# Allegro board EVAL-CN0565-ARDZ Allegro Project.brd
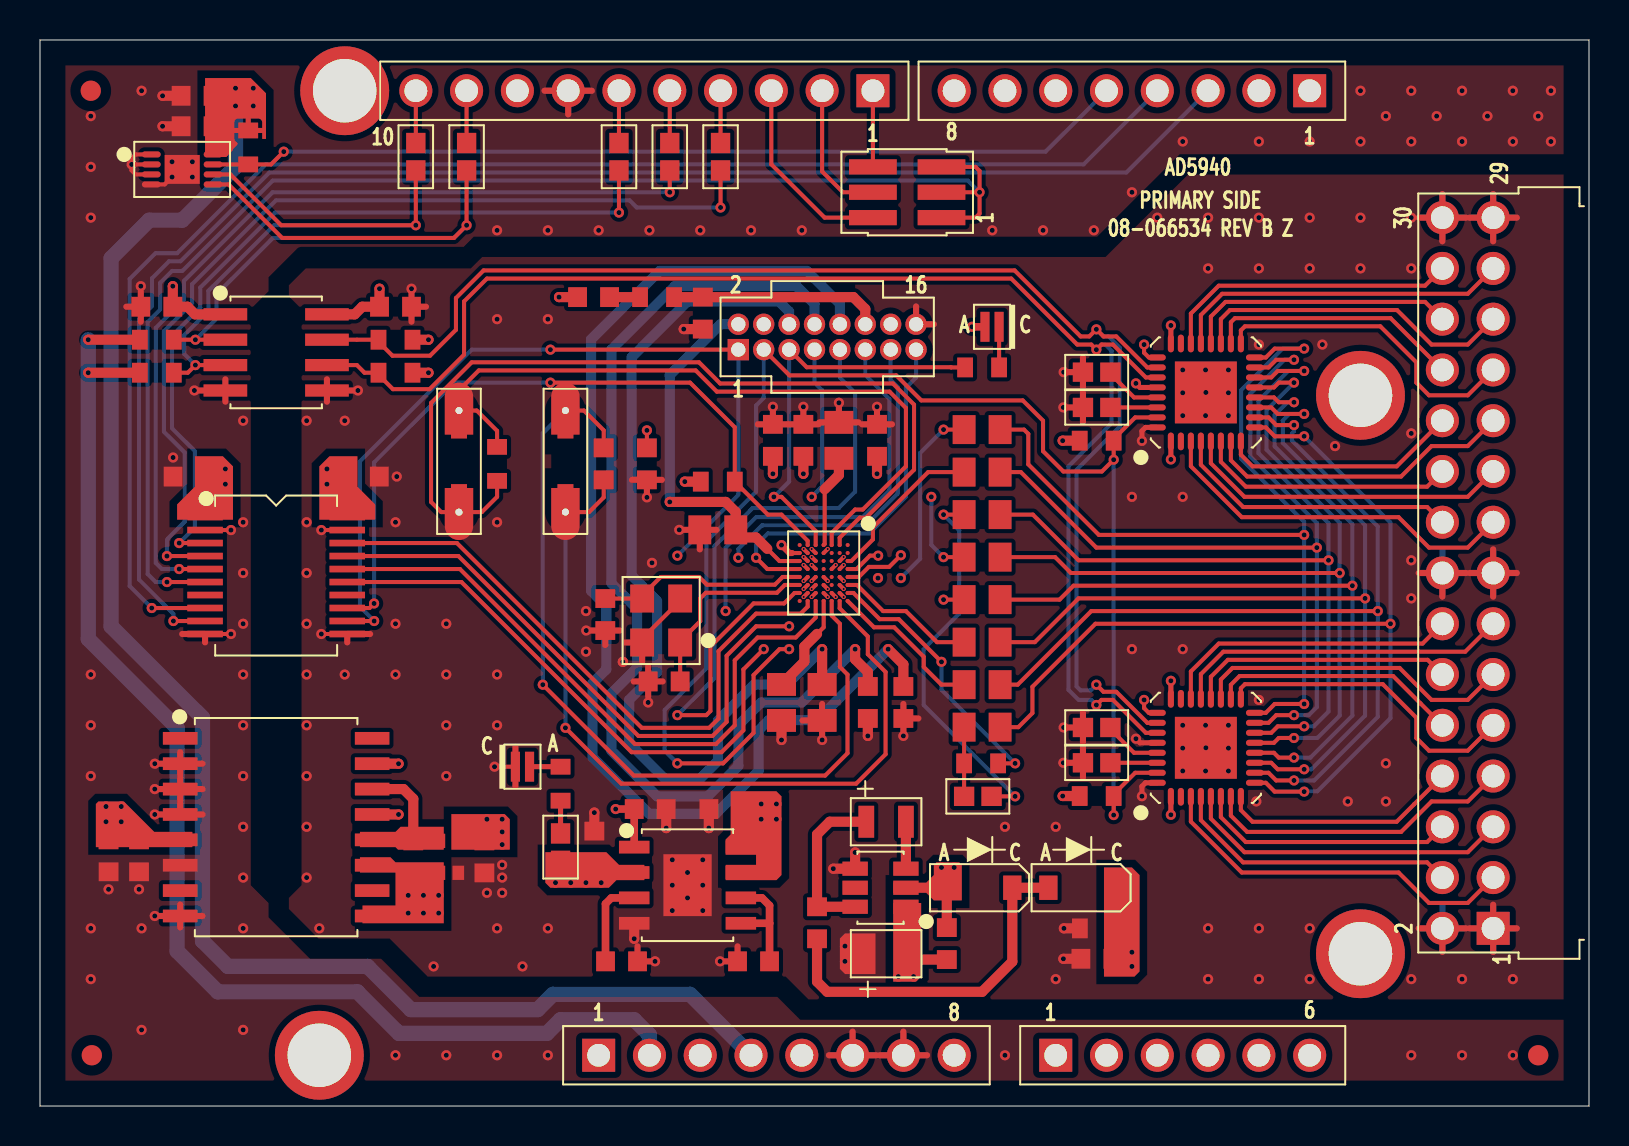
[diagram p0: board, top side]
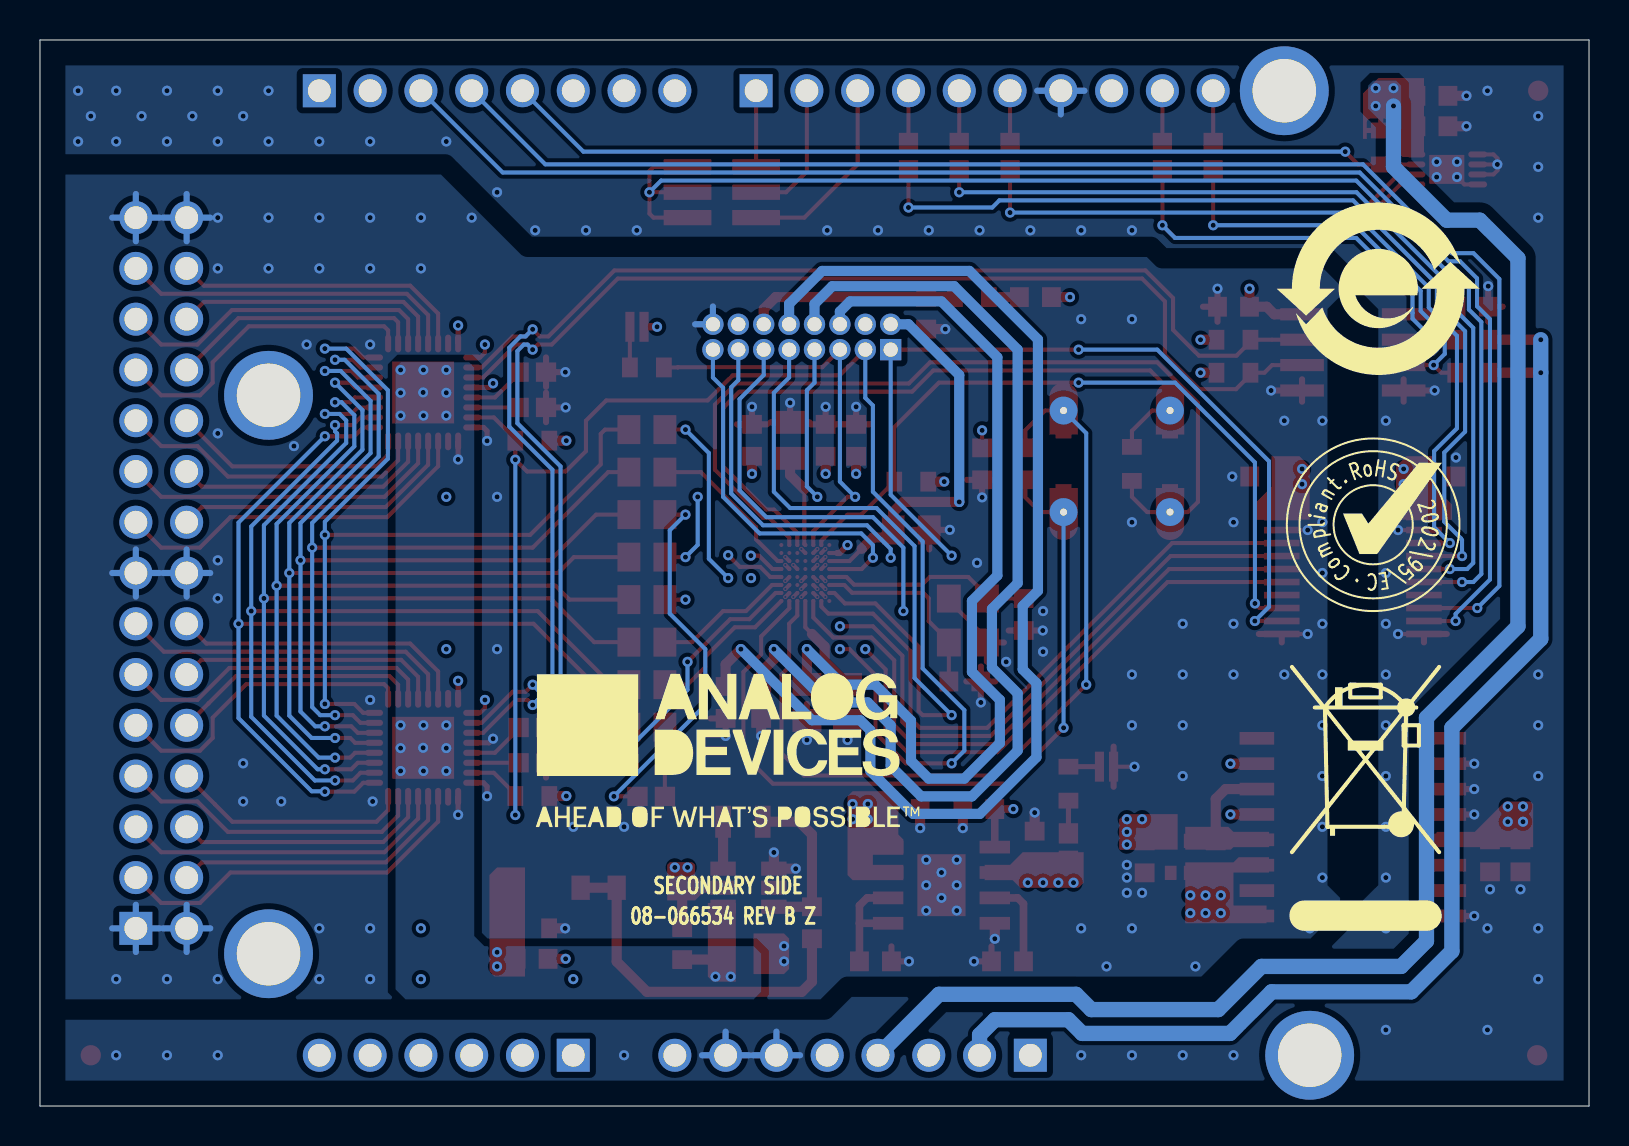
[diagram p1: board, bottom side, seen from below]

Outline 77.47 x 53.34 mm; copper layers: TOP, L2_GND, L3_PWR, BOTTOM. Coordinates in mm from the lower left corner of the outline.
Outline path: 0,53.34 0,0 77.47,0 77.47,53.34 0,53.34

## Design rules (mm)
constraint set DEFAULT: min track width 0.203

## Placement (name value [footprint] x y rotation side)
A1  ADUM1250ARZ  [SO8]  11.81 37.71 270 top
C1  0.47uF  [C0805]  47.12 18.96 180 top
C2  0.47uF  [C0805]  47.12 21.08 180 top
C3  0.47uF  [C0805]  47.12 23.21 180 top
C4  0.47uF  [C0805]  47.12 25.34 180 top
C5  0.47uF  [C0805]  47.12 27.46 180 top
C6  0.47uF  [C0805]  47.12 29.59 180 top
C7  0.47uF  [C0805]  47.12 31.72 180 top
C8  0.47uF  [C0805]  47.12 33.84 180 top
C9  4.7uF  [C0603]  41.86 33.31 90 top
C10  0.47uF  [C0805]  33.9 28.83 180 top
C11  2pF  [C0603]  31.22 21.24 180 top
C12  1uF  [C0603]  43.18 20.19 270 top
C13  0.1uF  [C0603]  41.4 20.19 270 top
C14  0.47uF  [C0805]  39.96 33.31 90 top
C15  2pF  [C0603]  28.27 24.59 270 top
C16  0.47uF  [C0805]  39.12 20.19 270 top
C17  0.47uF  [C0805]  37.08 20.19 270 top
C18  0.1uF  [C0603]  38.18 33.31 90 top
C19  0.1uF  [C0603]  36.65 33.31 90 top
C20  10uF  [C0603]  7.86 50.55 180 top
C21  0.1uF  [C0603]  7.86 49.02 180 top
C22  10uF  [C0603]  30.52 14.86 0 top
C23  1uF  [C0603]  29.08 7.24 0 top
C24  10uF  [C0603]  34.25 14.86 180 top
C25  1uF  [C0603]  35.69 7.24 180 top
C26  1uF  [C0603]  5.84 39.99 180 top
C27  10uF  [C0603]  27.72 12.95 90 top
C28  10uF  [C0603]  3.43 12.52 270 top
C30  0.1uF  [C0603]  4.95 12.52 270 top
C31  10uF  [C0603]  33.15 39.67 270 top
C32  0.1uF  [C0603]  18.67 12.47 270 top
C34  1uF  [C0603]  17.78 39.99 0 top
C35  10uF  [C0603]  22.23 12.47 270 top
C58  0.1uF  [C0603]  7.46 31.5 0 top
C59  0.1uF  [C0603]  16.17 31.5 0 top
C60  4.7uF  [CPL0805]  42.32 14.22 0 top
C61  4.7uF  [CPL0805]  42.32 7.62 0 top
C62  22uF  [C0603]  38.86 9.17 90 top
C63  22uF  [C0603]  52.86 7.37 180 top
C64  22uF  [C0603]  45.35 8.13 270 top
CLPF  0.22uF  [C0603]  30.35 32.13 270 top
CTIA  220pF  [C0603]  28.19 32.13 270 top
D1  1N4148W-7-F  [SOD123-2]  46.99 10.92 180 top
D2  1N4148W-7-F  [SOD123-2]  52.07 10.92 180 top
DS1  LXZ1-PD01  [LEDSML51W67H26]  47.61 38.99 180 top
DS2  LXZ1-PM01  [LEDSML51W67H26]  24.13 16.98 0 top
E1  600OHM AT 100MEGHZ  [L0603]  27.69 40.47 0 top
E2  1.8K AT 100MEGHZ  [L0402]  20.45 11.67 0 top
E3  1.8K AT 100MEGHZ  [L0402]  20.45 13.27 0 top
JP1  5110  [CNKEYSTONE5110]  52.85 18.94 0 top
JP2  5110  [CNKEYSTONE5110]  52.85 17.17 0 top
JP3  5110  [CNKEYSTONE5110]  52.85 36.72 0 top
JP4  5110  [CNKEYSTONE5110]  52.85 34.95 0 top
JP5  5110  [CNKEYSTONE5110]  46.9 15.49 0 top
JP7  5110  [CNKEYSTONE5110]  18.8 47.5 90 top
JP8  5110  [CNKEYSTONE5110]  21.34 47.5 90 top
JP9  5110  [CNKEYSTONE5110]  28.96 47.5 90 top
JP10  5110  [CNKEYSTONE5110]  31.5 47.5 90 top
JP11  5110  [CNKEYSTONE5110]  34.04 47.5 90 top
JP12  5110  [CNKEYSTONE5110]  26.04 12.95 90 top
NOREF  -  []  253.11 151.85 0 top
NOREF#2  -  []  0 53.34 0 top
NOREF#3  -  []  22.24 32.31 0 top
NOREF#4  -  [unnamed#2]  13.97 2.54 0 top
NOREF#5  -  []  13.97 2.54 0 top
NOREF#6  -  []  -111.76 -130.81 0 top
NOREF#7  -  []  -111.76 -130.81 0 top
NOREF#8  -  []  0 0 0 top
NOREF#9  -  []  24.13 16.98 0 top
NOREF#10  -  []  26.15 31.26 0 top
NOREF#11  -  []  27.94 2.54 0 top
NOREF#12  -  []  38.23 8.89 270 top
NOREF#13  -  [unnamed#2]  15.24 50.8 0 top
NOREF#14  -  []  22.39 31.26 0 top
NOREF#15  -  []  77.47 0 0 top
NOREF#16  -  [unnamed#3]  2.54 50.8 0 top
NOREF#17  -  []  -75.44 4.19 0 top
NOREF#18  -  [unnamed#2]  66.04 7.62 0 top
NOREF#19  -  []  -111.76 -130.81 0 top
NOREF#20  -  []  0 0 0 top
NOREF#21  -  []  77.47 0 90 top
NOREF#22  -  []  13.97 2.54 0 top
NOREF#23  -  []  -73.66 195.58 0 top
NOREF#24  -  []  -111.76 -130.81 0 top
NOREF#25  -  []  0 0 0 top
NOREF#26  -  []  286 327.41 0 top
NOREF#27  -  [unnamed#3]  2.59 2.54 0 top
NOREF#28  -  []  -50.8 240.03 0 top
NOREF#29  -  [unnamed#2]  66.04 35.56 0 top
NOREF#30  -  [unnamed#3]  74.93 2.54 0 top
NOREF#31  -  []  77.47 0 90 top
NOREF#32  -  []  172.47 93.73 0 top
NOREF#33  -  []  77.47 53.34 180 top
NOREF#34  -  []  0 53.34 0 top
NOREF#35  -  []  0 53.34 270 top
NOREF#36  -  []  25.79 30.71 0 top
NOREF#37  -  []  268.35 154.69 0 top
NOREF#38  -  []  10.54 40.89 180 bottom
NOREF#39  -  []  43.05 17.78 180 bottom
NOREF#40  -  []  1.91 25.65 180 bottom
NOREF#41  -  []  10.8 29.08 180 bottom
P1  TSW-115-08-F-D-RA  [CNHDRRA2X15H224]  72.68 8.89 90 top
P3  FTSH-108-01-L-D-K  [CNHDR2X8H235]  34.92 37.85 0 top
P4  SSQ-106-03-G-S  [CNSAMTECSSQ-106-XX-X-S]  50.8 2.54 0 top
P5  SSQ-108-03-G-S  [CNSAMTECSSQ-108-XX-X-S]  27.94 2.54 0 top
P7  20021121-00006C4LF  [CNSMMHDR2X3L150W135H193]  43.37 45.72 90 top
P8  SSQ-110-03-G-S  [CNSAMTECSSQ-110-XX-X-S]  41.66 50.8 180 top
P9  SSQ-108-03-G-S  [CNSAMTECSSQ-108-XX-X-S]  63.5 50.8 180 top
R19  10K  [R0603]  52.85 15.51 0 top
R20  10K  [R0603]  52.85 33.29 0 top
R27  1K  [R0603]  47.07 17.14 0 top
R28  560  [R0603]  47.12 36.96 180 top
R29  4.7K  [R0603]  10.41 47.96 270 top
R30  4.7K  [R0603]  5.84 36.69 0 top
R31  4.7K  [R0603]  5.84 38.34 0 top
R32  2.2  [R0603]  30.86 40.47 0 top
R33  4.7K  [R0603]  17.78 38.34 180 top
R34  4.7K  [R0603]  17.78 36.69 180 top
R35  560  [R0603]  26.04 16.13 90 top
R36  10K  [R0603]  33.9 31.24 180 top
R37  10K  [R0603]  52.86 8.89 180 top
RCAL  1K  [R0603]  22.86 32.13 270 top
RCAL_X  R0805_R0603_TH200LD25  [R0805_0603_TH200LD25]  20.96 34.8 270 top
RTIA_X  R0805_R0603_TH200LD25  [R0805_0603_TH200LD25]  26.28 34.8 270 top
U1  ADG2128BCPZ  [QFN32_5X5_PAD3_1X3_1]  58.31 17.92 0 top
U2  ADG2128BCPZ  [QFN32_5X5_PAD3_1X3_1]  58.31 35.7 0 top
U3  AD5940  [WLCSP56]  39.19 26.67 180 top
U4  24LC32A-I/MC  [DFN8_2X3_PAD1_45X1_75]  7.11 46.86 270 top
U5  ADM7150ARDZ-3.3  [SO8NB-PAD3_1X2_41]  32.38 11.05 270 top
U6  ADUM3151BRSZ  [SSOP20-4]  11.81 26.54 270 top
U7  ADUM5020-5BRWZ  [SO16WB]  11.81 13.95 270 top
U8  ADM8829ARTZ  [SOT23_6]  42.04 10.92 90 top
Y1  16MEGHZ  [YSML126W98H31]  31.07 24.29 90 top

## Library data of the parts
A1 = ADUM1250: Tolerance: N/A; User Part Number: UPN; alternate symbols: (); part number: ADUM1250_SM-ADUM1250ARZ,E006087,SO8; tolerance: N/A
C1-C8 C10 C14 C16 C17 = CAP: User Part Number: UPN; Tolerance: 10; alternate symbols: (C0805L); part number: CAP_SM-0.47UF,16V,10,E000566,C0805; tolerance: 10
C9 = CAP: User Part Number: UPN; Tolerance: 10; alternate symbols: (C0603L); part number: CAP_SM-4.7UF,16V,10,E022190,C0603; tolerance: 10
C11 C15 = CAP: User Part Number: UPN; Tolerance: 0.1pF; alternate symbols: (C0603L); part number: CAP_SM-2PF,250V,0.1PF,E006687,C0603; tolerance: 0.1pF
C12 C23 C25 C26 C34 = CAP: User Part Number: UPN; Tolerance: 10; alternate symbols: (C0603L); part number: CAP_SM-1UF,16V,10,E020111,C0603; tolerance: 10
C13 C18 C19 C21 C30 C32 C58 C59 = CAP: User Part Number: UPN; Tolerance: 10; alternate symbols: (C0603L); part number: CAP_SM-0.1UF,16V,10,E011547,C0603; tolerance: 10
C20 C22 C24 C27 C28 C31 C35 = CAP: User Part Number: UPN; Tolerance: 10; alternate symbols: (C0603L); part number: CAP_SM-10UF,10V,10,E031791,C0603; tolerance: 10
C60 C61 = CAPP: Tolerance: 20; User Part Number: UPN; alternate symbols: (); part number: CAPP_SM-4.7UF,10V,20,E020900,CPL0805; tolerance: 20
C62-C64 = CAP: User Part Number: UPN; Tolerance: 20; alternate symbols: (C0603L); part number: CAP_SM-22UF,10V,20,E022680,C0603; tolerance: 20
CLPF = CAP: User Part Number: UPN; Tolerance: 10; alternate symbols: (C0603L,C0603L_ALT); part number: CAP_SM-0.22UF,25V,10,E028829,C0603; tolerance: 10
CTIA = CAP: User Part Number: UPN; Tolerance: 5; alternate symbols: (C0603L); part number: CAP_SM-220PF,50V,5,E000417,C0603; tolerance: 5
D1 D2 = DIO: User Part Number: UPN; Tolerance: N/A; alternate symbols: (); part number: DIO_SM-1N4148W-7-F,100V,N/A,E018902,SOD123-2; tolerance: N/A
DS1 = DIOLED: User Part Number: UPN; Tolerance: N/A; alternate symbols: (); part number: DIOLED_SM-LXZ1-PD01,2.2V,N/A,E035636,LEDSML51W67H26; tolerance: N/A
DS2 = DIOLED: User Part Number: UPN; Tolerance: N/A; alternate symbols: (); part number: DIOLED_SM-LXZ1-PM01,N/A,N/A,E024055,LEDSML51W67H26; tolerance: N/A
E1 = FERRITE: User Part Number: UPN; Tolerance: 25; alternate symbols: (L0603L); part number: FERRITE_SM-600OHM AT 100MEGHZ,25,E028908,L0603; tolerance: 25
E2 E3 = FERRITE: User Part Number: UPN; Tolerance: 25; alternate symbols: (L0402L); part number: FERRITE_SM-1.8K AT 100MEGHZ,25,E027761,L0402; tolerance: 25
JP1-JP5 JP7-JP12 = CNJMPRSHRT: User Part Number: UPN; Tolerance: N/A; alternate symbols: (); part number: CNJMPRSHRT_SM-5110,E035497,CNKEYSTONE5110; tolerance: N/A
P1 = CN30P_ODD_EVEN_V2: User Part Number: UPN; Tolerance: N/A; alternate symbols: (); part number: CN30P_ODD_EVEN_V2_TH-TSW-115-08-F-D-RA,E021381,CNHDRRA2X15H224; tolerance: N/A
P3 = CN16P_ODD_EVEN: Tolerance: N/A; User Part Number: UPN; alternate symbols: (); part number: CN16P_ODD_EVEN_TH-FTSH-108-01-L-D-K,E021293,CNHDR2X8H235; tolerance: N/A
P4 = CN6P: User Part Number: UPN; Tolerance: N/A; alternate symbols: (); part number: CN6P_TH-SSQ-106-03-G-S,E020477,CNSAMTECSSQ-106-XX-X-S; tolerance: N/A
P5 P9 = CN8P_A: User Part Number: UPN; Tolerance: N/A; alternate symbols: (); part number: CN8P_A_TH-SSQ-108-03-G-S,E020478,CNSAMTECSSQ-108-XX-X-S; tolerance: N/A
P7 = CN6P_ODD_EVEN: User Part Number: UPN; Tolerance: N/A; alternate symbols: (); part number: CN6P_ODD_EVEN_SM-20021121-00006C4LF,E029195,CNSMMHDR2X3L150W135H193; tolerance: N/A
P8 = CN10P: User Part Number: UPN; Tolerance: N/A; alternate symbols: (); part number: CN10P_TH-SSQ-110-03-G-S,E020479,CNSAMTECSSQ-110-XX-X-S; tolerance: N/A
R19 R20 R36 R37 = RES: User Part Number: UPN; Tolerance: 5; alternate symbols: (R0603L); part number: RES_SM-10K,E028377,1/10W,5,R0603; tolerance: 5
R27 RCAL = RES: User Part Number: UPN; Tolerance: 1; alternate symbols: (R0603L); part number: RES_SM-1K,E029591,1/10W,1,R0603; tolerance: 1
R28 R35 = RES: User Part Number: UPN; Tolerance: 1; alternate symbols: (R0603L); part number: RES_SM-560,E004245,1/16W,1,R0603; tolerance: 1
R29-R31 R33 R34 = RES: User Part Number: UPN; Tolerance: 1; alternate symbols: (R0603L); part number: RES_SM-4.7K,E010097,1/10W,1,R0603; tolerance: 1
R32 = RES: User Part Number: UPN; Tolerance: 1; alternate symbols: (R0603L); part number: RES_SM-2.2,E017481,1/10W,1,R0603; tolerance: 1
RCAL_X RTIA_X = RES: Tolerance: N/A; User Part Number: UPN; alternate symbols: (); part number: RES_TH-R0805_R0603_TH200LD25,E028311,N/A,N/A,R0805_0603_TH200LD25; tolerance: N/A
U1 U2 = ADG2128: User Part Number: UPN; Tolerance: N/A; alternate symbols: (); part number: ADG2128_SM-ADG2128BCPZ,E010683,QFN32_5X5_PAD3_1X3_1; tolerance: N/A
U3 = AD5940: Tolerance: N/A; User Part Number: UPN; alternate symbols: (); part number: AD5940_SM-AD5940,E027747,WLCSP56; tolerance: N/A
U4 = IC24XX32A: Tolerance: N/A; User Part Number: UPN; alternate symbols: (); part number: IC24XX32A_SM-24LC32A-I/MC,E014159,DFN8_2X3_PAD1_45X1_75; tolerance: N/A
U5 = ADM7150: Tolerance: N/A; User Part Number: UPN; alternate symbols: (); part number: ADM7150_SM-ADM7150ARDZ-3.3,E018052,SO8NB-PAD3_1X2_41; tolerance: N/A
U6 = ADUM3151: Tolerance: N/A; User Part Number: UPN; alternate symbols: (); part number: ADUM3151_SM-ADUM3151BRSZ,E021805,SSOP20-4; tolerance: N/A
U7 = ADUM5020: Tolerance: N/A; User Part Number: UPN; alternate symbols: (); part number: ADUM5020_SM-ADUM5020-5BRWZ,E028567,SO16WB; tolerance: N/A
U8 = ADM8829: User Part Number: UPN; Tolerance: N/A; alternate symbols: (); part number: ADM8829_SM-ADM8829ARTZ,E017975,SOT23_6; tolerance: N/A
Y1 = XTAL4PIN_V3: Tolerance: 10PPM; User Part Number: UPN; alternate symbols: (); part number: XTAL4PIN_V3_SM-16MEGHZ,E029612,YSML126W98H31; tolerance: 10PPM

## Footprints (pads in the part's own frame, mm; a bottom-side part is the same pattern mirrored in y, then rotated)
C0603
  rect 0.94x0.991 smd: 1(-0.8,0) 2(0.8,0)
C0805
  rect 1.143x1.448 smd: 1(-0.9,0) 2(0.9,0)
CNHDR2X8H235
  rect 1.067x1.067 hole 0.711: 1(0,0)
  round 1.067 hole 0.711: 2(0,1.27) 3(1.27,0) 4(1.27,1.27) 5(2.54,0) 6(2.54,1.27) 7(3.81,0) 8(3.81,1.27) 9(5.08,0) 10(5.08,1.27) 11(6.35,0) 12(6.35,1.27) 13(7.62,0) 14(7.62,1.27) 15(8.89,0) 16(8.89,1.27)
CNHDRRA2X15H224
  rect 1.651x1.651 hole 1.143: 1(0,0)
  round 1.651 hole 1.143: 2(0,2.54) 3(2.54,0) 4(2.54,2.54) 5(5.08,0) 6(5.08,2.54) 7(7.62,0) 8(7.62,2.54) 9(10.16,0) 10(10.16,2.54) 11(12.7,0) 12(12.7,2.54) 13(15.24,0) 14(15.24,2.54) 15(17.78,0) 16(17.78,2.54) 17(20.32,0) 18(20.32,2.54) 19(22.86,0) 20(22.86,2.54) 21(25.4,0) 22(25.4,2.54) 23(27.94,0) 24(27.94,2.54) 25(30.48,0) 26(30.48,2.54) 27(33.02,0) 28(33.02,2.54) 29(35.56,0) 30(35.56,2.54)
CNKEYSTONE5110
  rect 1.016x0.965 smd: 1(-0.686,0) 2(0.686,0)
CNSAMTECSSQ-106-XX-X-S
  rect 1.651x1.651 hole 1.143: 1(0,0)
  round 1.651 hole 1.143: 2(2.54,0) 3(5.08,0) 4(7.62,0) 5(10.16,0) 6(12.7,0)
CNSAMTECSSQ-108-XX-X-S
  rect 1.651x1.651 hole 1.143: 1(0,0)
  round 1.651 hole 1.143: 2(2.54,0) 3(5.08,0) 4(7.62,0) 5(10.16,0) 6(12.7,0) 7(15.24,0) 8(17.78,0)
CNSAMTECSSQ-110-XX-X-S
  rect 1.651x1.651 hole 1.143: 1(0,0)
  round 1.651 hole 1.143: 2(2.54,0) 3(5.08,0) 4(7.62,0) 5(10.16,0) 6(12.7,0) 7(15.24,0) 8(17.78,0) 9(20.32,0) 10(22.86,0)
CNSMMHDR2X3L150W135H193
  rect 0.762x2.388 smd: 1(-1.27,-1.715) 2(-1.27,1.715) 3(0,-1.715) 4(0,1.715) 5(1.27,-1.715) 6(1.27,1.715)
CPL0805
  rect 0.787x1.6 smd: N(0.991,0) P(-0.991,0)
DFN8_2X3_PAD1_45X1_75
  oval 0.305x0.94 smd: 1(-0.75,-1.545) 2(-0.25,-1.545) 3(0.25,-1.545) 4(0.75,-1.545) 5(0.75,1.545) 6(0.25,1.545) 7(-0.25,1.545) 8(-0.75,1.545)
  rect 1.448x1.753 smd: PAD(0,0)
L0402
  rect 0.584x0.711 smd: 1(-0.475,0) 2(0.475,0)
L0603
  rect 0.94x0.991 smd: 1(-0.8,0) 2(0.8,0)
LEDSML51W67H26
  rect 0.457x1.499 smd: A(0.354,0) C(-0.354,0)
QFN32_5X5_PAD3_1X3_1
  oval 0.305x0.889 smd: 1(-1.75,-2.45) 2(-1.25,-2.45) 3(-0.75,-2.45) 4(-0.25,-2.45) 5(0.25,-2.45) 6(0.75,-2.45) 7(1.25,-2.45) 8(1.75,-2.45) 17(1.75,2.45) 18(1.25,2.45) 19(0.75,2.45) 20(0.25,2.45) 21(-0.25,2.45) 22(-0.75,2.45) 23(-1.25,2.45) 24(-1.75,2.45)
  oval 0.889x0.305 smd: 9(2.45,-1.75) 10(2.45,-1.25) 11(2.45,-0.75) 12(2.45,-0.25) 13(2.45,0.25) 14(2.45,0.75) 15(2.45,1.25) 16(2.45,1.75) 25(-2.45,1.75) 26(-2.45,1.25) 27(-2.45,0.75) 28(-2.45,0.25) 29(-2.45,-0.25) 30(-2.45,-0.75) 31(-2.45,-1.25) 32(-2.45,-1.75)
  rect 3.099x3.099 smd: PAD(0,0)
R0603
  rect 0.787x0.991 smd: 1(-0.85,0) 2(0.85,0)
R0805_0603_TH200LD25
  custom 2.794x1.422 hole 0.889: 1(0,0) 2(5.08,0)
SO8
  rect 0.61x2.184 smd: 1(-1.905,-2.54) 2(-0.635,-2.54) 3(0.635,-2.54) 4(1.905,-2.54) 5(1.905,2.54) 6(0.635,2.54) 7(-0.635,2.54) 8(-1.905,2.54)
SO8NB-PAD3_1X2_41
  rect 0.635x1.524 smd: 1(-1.905,-2.667) 2(-0.635,-2.667) 3(0.635,-2.667) 4(1.905,-2.667) 5(1.905,2.667) 6(0.635,2.667) 7(-0.635,2.667) 8(-1.905,2.667)
  rect 3.099x2.413 smd: PAD(0,0)
SO16WB
  rect 0.635x1.727 smd: 1(-4.445,-4.801) 2(-3.175,-4.801) 3(-1.905,-4.801) 4(-0.635,-4.801) 5(0.635,-4.801) 6(1.905,-4.801) 7(3.175,-4.801) 8(4.445,-4.801) 9(4.445,4.801) 10(3.175,4.801) 11(1.905,4.801) 12(0.635,4.801) 13(-0.635,4.801) 14(-1.905,4.801) 15(-3.175,4.801) 16(-4.445,4.801)
SOD123-2
  rect 0.914x1.219 smd: A(1.638,0) C(-1.638,0)
SOT23_6
  rect 0.711x1.27 smd: 1(-0.953,-1.27) 2(0,-1.27) 3(0.953,-1.27) 4(0.953,1.27) 5(0,1.27) 6(-0.953,1.27)
SSOP20-4
  rect 0.33x1.778 smd: 1(-2.925,-3.555) 2(-2.275,-3.555) 3(-1.625,-3.555) 4(-0.975,-3.555) 5(-0.325,-3.555) 6(0.325,-3.555) 7(0.975,-3.555) 8(1.625,-3.555) 9(2.275,-3.555) 10(2.925,-3.555) 11(2.925,3.555) 12(2.275,3.555) 13(1.625,3.555) 14(0.975,3.555) 15(0.325,3.555) 16(-0.325,3.555) 17(-0.975,3.555) 18(-1.625,3.555) 19(-2.275,3.555) 20(-2.925,3.555)
unnamed#2
  round 4.445 hole 3.175 unplated: (0,0)
unnamed#3
  round 1.016 smd: (0,0)
WLCSP56
  round 0.203 smd: A1(-1.2,-1.4) A2(-1.2,-1) A3(-1.2,-0.6) A4(-1.2,-0.2) A5(-1.2,0.2) A6(-1.2,0.6) A7(-1.2,1) A8(-1.2,1.4) B1(-0.8,-1.4) B2(-0.8,-1) B3(-0.8,-0.6) B4(-0.8,-0.2) B5(-0.8,0.2) B6(-0.8,0.6) B7(-0.8,1) B8(-0.8,1.4) C1(-0.4,-1.4) C2(-0.4,-1) C3(-0.4,-0.6) C4(-0.4,-0.2) C5(-0.4,0.2) C6(-0.4,0.6) C7(-0.4,1) C8(-0.4,1.4) D1(0,-1.4) D2(0,-1) D3(0,-0.6) D4(0,-0.2) D5(0,0.2) D6(0,0.6) D7(0,1) D8(0,1.4) E1(0.4,-1.4) E2(0.4,-1) E3(0.4,-0.6) E4(0.4,-0.2) E5(0.4,0.2) E6(0.4,0.6) E7(0.4,1) E8(0.4,1.4) F1(0.8,-1.4) F2(0.8,-1) F3(0.8,-0.6) F4(0.8,-0.2) F5(0.8,0.2) F6(0.8,0.6) F7(0.8,1) F8(0.8,1.4) G1(1.2,-1.4) G2(1.2,-1) G3(1.2,-0.6) G4(1.2,-0.2) G5(1.2,0.2) G6(1.2,0.6) G7(1.2,1) G8(1.2,1.4)
YSML126W98H31
  rect 1.397x1.194 smd: 1(-1.1,-0.95) 2(1.1,-0.95) 3(1.1,0.95) 4(-1.1,0.95)

## Nets
3V_ARD: C20.1 C21.1 C58.2(N2) P5.4 R29.1 U4.8 U6.1
5V: C22.1 C24.1 C35.1 C64.1 D1.A(P) E3.2(N2) U5.1(VREG) U5.7 U5.8 U8.2
5V_ARD: C28.1 C30.1 P5.5 U7.5
AVDD: C18.1 C19.1 C31.1 P3.12 R32.2(N2) U3.A4 U3.F2
DVDD: A1.8(VDD2) C27.1 C34.1 C59.1 DS1.A(P) E1.1 JP12.1 P3.14 R19.1 R20.1 R33.1 R34.1 R36.2(N2) U1.25 U2.25 U2.28 U3.F3 U3.G2 U5.2 U6.20
DVDD_REG1V8: C10.1 P3.2 U3.G3
GND: A1.4 C20.2(N2) C21.2(N2) C26.2(N2) C28.2(N2) C30.2(N2) C58.1 P5.6 P5.7 P8.7 U4.1 U4.2 U4.3 U4.4 U4.PAD U6.2 U6.10 U7.2 U7.3 U7.4 U7.6 U7.8
GND_ISO: A1.5 C9.2(N2) C10.2(N2) C11.2(N2) C12.2(N2) C13.2(N2) C14.2(N2) C15.2(N2) C16.2(N2) C17.2(N2) C18.2(N2) C19.2(N2) C22.2(N2) C23.2(N2) C24.2(N2) C25.2(N2) C27.2(N2) C31.2(N2) C34.2(N2) C35.2(N2) C59.2(N2) C61.P C63.2(N2) CLPF.2(N2) DS2.C E2.2(N2) JP1.1 JP2.1 JP3.1 JP4.1 P1.1 P1.2 P1.15 P1.16 P1.29 P1.30 P3.16(N8) R37.2(N2) U1.28 U1.32 U2.32 U3.C4 U3.D5 U3.E3 U3.E4 U3.E5 U3.E6 U5.4 U5.PAD U6.11 U6.19 U8.4 Y1.2 Y1.4
+VS: C63.1 D2.C R37.1 U1.24 U2.24
-VS: C61.N(N2) C64.2(N2) U1.1 U1.PAD U2.1 U2.PAD U8.1(OUT)
AIN0: C5.2(N2) U3.D2
AIN1: C6.2(N2) JP5.2(S2) U3.B3
AIN2: C7.2(N2) U3.A3
AIN3: C8.2(N2) U3.B5
AIN4: CLPF.1 U3.B4
CE0: R27.2(N2) U3.A7
CS: U3.F7 U6.15
CS_ARD: P7.1 P7.3 P7.5 U6.6
DE0: C4.2(N2) U3.B6
GP0: P3.1 U3.F5 U6.12
GP1: P3.3 R19.2(N2) R20.2(N2) U1.31 U2.31 U3.D6
GP2: P3.5 R28.2(N2) U3.E1
GP3: P3.7 U3.E2
GP4: P3.9 U3.G7
GP5: P3.11 U3.F6
GP6: P3.13 U3.F4
GP7: P3.15 U3.G4
INT: P9.3 U6.9(VOC)
IOVDD: A1.1 C26.1 P5.2 R30.1 R31.1
MISO: U3.E8 U6.16
MISO_ARD: JP10.1 U6.5
MOSI: U3.E7 U6.17
MOSI_ARD: JP11.1 U6.4
RC0_0: CTIA.1 RTIA_X.1 U3.C8
RC0_1: CTIA.2(N2) RTIA_X.2(N2) U3.B8
RCAL0: RCAL.1 RCAL_X.1 U3.C1
RCAL1: RCAL.2(N2) RCAL_X.2(N2) U3.B1
RE0: C2.2(N2) U3.A8
RESET: R36.1 U3.F1 U6.13
RST: P9.4 U6.8
SCL: A1.6 R34.2(N2) U1.27 U2.27
SCL_ARD: A1.3 JP7.1 R30.2(N2) U4.6
SCLK: U3.F8 U6.18
SCLK_ARD: JP9.1 U6.3
SDA: A1.7 R33.2(N2) U1.26 U2.26
SDA_ARD: A1.2 JP8.1 R31.2(N2) U4.5
SE0: C3.2(N2) U3.A6
UNNAMED_2_AD5940_I2_AVDDREG: C17.1 U3.D8
UNNAMED_2_AD5940_I2_VBIASCAP: C14.1 U3.D1
UNNAMED_2_ADG2128_I3_A1: JP1.2(S2) U1.29
UNNAMED_2_ADG2128_I3_A2: JP2.2(S2) U1.30
UNNAMED_2_ADG2128_I4_A1: JP3.2(S2) U2.29
UNNAMED_2_ADG2128_I4_A2: JP4.2(S2) U2.30
UNNAMED_2_CAP_I21_N2: C1.2(N2) JP5.1 R27.1
UNNAMED_2_DIOLED_I62_N: DS1.C R28.1
UNNAMED_3_ADM7150_I11_BYP: C23.1 U5.3
UNNAMED_3_ADM7150_I11_REF: C25.1 U5.5 U5.6
UNNAMED_3_ADM8829_I84_CAP: C60.N(N2) U8.3
UNNAMED_3_ADM8829_I84_CAP_1: C60.P C62.2(N2) U8.6
UNNAMED_3_ADUM5020_I1_GNDISO1: C32.2(N2) E2.1 U7.9 U7.11 U7.13 U7.15
UNNAMED_3_ADUM5020_I1_VISO: C32.1 E3.1 U7.12 U7.14(VSEL)
UNNAMED_3_CAP_I88_N1: C62.1 D1.C D2.A(P)
UNNAMED_3_CN10P_I76_N1: P7.6(N6) P8.1
UNNAMED_3_CN10P_I76_N2: P7.4 P8.2
UNNAMED_3_CN10P_I76_N3: P7.2 P8.3
UNNAMED_3_CN10P_I76_N4: JP11.2(S2) P8.4
UNNAMED_3_CN10P_I76_N5: JP10.2(S2) P8.5
UNNAMED_3_CN10P_I76_N6: JP9.2(S2) P8.6
UNNAMED_3_CN10P_I76_N9: JP8.2(S2) P8.9(N9)
UNNAMED_3_CN10P_I76_N10: JP7.2(S2) P8.10
UNNAMED_3_CNJMPRSHRT_I57_S2: JP12.2(S2) R35.1
UNNAMED_3_DIOLED_I54_P: DS2.A(P) R35.2(N2)
UNNAMED_3_FERRITE_I22_N2: E1.2(N2) R32.1
VBIAS: C13.1 P3.8 U3.C7
VREF_1V8: C9.1 P3.4 U3.A5
VREF_2V5: C16.1 P3.6 U3.D7
VZERO: C12.1 P3.10 U3.B7
WP: P9.5 R29.2(N2) U4.7(WP)
X0: P1.3 U1.3
X1: P1.4 U1.4
X2: P1.5 U1.5
X3: P1.6 U1.6
X4: P1.7 U1.7
X5: P1.8 U1.8
X6: P1.9 U1.17
X7: P1.10 U1.18
X8: P1.11 U1.19
X9: P1.12 U1.20
X10: P1.13 U1.21
X11: P1.14 U1.22
X12: P1.17 U2.3
X13: P1.18(N9) U2.4
X14: P1.19 U2.5
X15: P1.20 U2.6
X16: P1.21 U2.7
X17: P1.22 U2.8
X18: P1.23 U2.17
X19: P1.24 U2.18
X20: P1.25 U2.19
X21: P1.26 U2.20
X22: P1.27 U2.21
X23: P1.28 U2.22
XTALI: C15.1 U3.G5 Y1.3(N2)
XTALO: C11.1 U3.G6(XTALO) Y1.1
Y0: C1.1 U1.9 U2.9
Y1: C2.1 U1.10 U2.10
Y2: C3.1 U1.11 U2.11
Y3: C4.1 U1.12 U2.12
Y4: C5.1 U1.13 U2.13
Y5: C6.1 U1.14 U2.14
Y6: C7.1 U1.15 U2.15
Y7: C8.1 U1.16(Y7) U2.16(Y7)

Pads without a net: P4 1 2 3 4 5 6; P5 1 3 8; P8 8; P9 1 2 6 7 8; U1 2 23; U2 2 23; U3 A1 A2 B2 C2 C3 C5 C6 D3 D4 G1 G8; U6 7 14; U7 1 7 10 16; U8 5

## Via types
v1: diameter 0.508, hole 0.254, TOP to BOTTOM, 354 vias
v2: diameter 0.203, hole 0.102, TOP to L2_GND, 23 vias

## Routing (per net, layer and track width the routed paths; a pad name or vN(x,y) marks a point on that pad's centre or on a via; arc(x,y) is an arc through that point)
3V_ARD: length 82.2
  TOP w0.254: R29.1 11.16,48.81 ; R29.1 9.66,48.81 ; R29.1 10.41,49.46 ; C21.1 U4.8 9.26,47.61 9.53,47.88
  BOTTOM w0.762: v1(9.78,50.04) 9.78,46.99 7.11,44.32 5.46,44.32 3.56,42.42 3.56,24 8.13,19.43 8.13,8.25 9.4,6.99 16.38,6.99 18.54,4.83 24.89,4.83 25.65,5.59 32.51,5.59 P5.4
  vias: v1(9.27,31.88) v1(9.27,31.11) v1(9.78,50.93) v1(10.67,50.93) v1(10.67,50.04)
5V: length 4.8
  TOP w0.381: v1(28.79,14.86) C22.1 U5.1
  TOP w0.508: D1.A C64.1
  vias: v1(22.35,14.35) v1(23.11,14.35) v1(23.11,13.72) v1(23.11,13.08) v1(36.07,15.11) v1(36.07,14.35) v1(36.83,15.11) v1(36.83,14.35) v1(45.09,11.94) v1(45.72,11.94)
5V_ARD: length 2.4
  L3_PWR w0.508: 38.1,3.72 P5.5 36.92,2.54
  vias: v1(3.3,14.99) v1(3.3,14.22) v1(4.06,14.99) v1(4.06,14.22)
AVDD: length 49.2
  TOP w0.203: v1(41.92,27.54) 41.51,27.54 40.84,26.87 U3.A4 ; U3.F2 v2(38.19,27.87)
  TOP w0.508: P3.12 41.27,39.88 40.68,40.47 C31.1 R32.2 ; C19.1 v1(36.65,31.63) ; C18.1 v1(38.18,31.63)
  L2_GND w0.203: 37.72,28.98 37.72,28.34 v2(38.19,27.87)
  L2_GND w0.508: 37.72,28.98 37.72,31.17 v1(38.18,31.63)
  L3_PWR w0.508: P3.12 41.27,40.01 40.01,41.27 33.02,41.27 31.37,39.62 31.37,36.32 36.06,31.63 v1(36.65,31.63) v1(38.18,31.63) 39.74,31.63 41.92,29.46 v1(41.92,27.54)
DVDD: length 15.5
  TOP w0.203: U2.25 55.46,37.45 55.22,37.69 v1(55.22,38.1) ; v1(55.22,20.32) 55.22,19.91 55.46,19.67 U1.25 ; U3.F3 v2(38.19,27.47) ; U3.G2 37.61,27.67
  TOP w0.254: v1(54.81,36.16) 55.02,35.95 U2.28
  TOP w0.305: v1(37.08,28.07) 37.48,27.67 37.61,27.67
  TOP w0.381: DS1.A v1(46.61,38.99)
  TOP w0.508: R19.1 v1(51.15,15.51) ; 14.35,39.61 15.74,39.61 16.12,39.99 C34.1 v1(16.98,40.89) ; R36.2 v1(32.25,31.24) ; E1.1 v1(25.96,40.47) ; R20.1 v1(51.15,33.29) ; R33.1 v1(19.43,38.34) ; R34.1 v1(19.43,36.69)
  L2_GND w0.203: v1(37.08,28.07) 37.68,27.47 v2(38.19,27.47)
  vias: v1(14.35,31.88) v1(14.35,31.11) v1(25.78,11.18) v1(26.54,11.18) v1(27.3,11.18) v1(28.07,11.18)
DVDD_REG1V8: length 19.1
  TOP w0.203: 36.37,27.88 36.98,27.27 U3.G3
  TOP w0.508: 36.37,27.88 35.8,28.45 35.18,28.45 C10.1 34.8,29.72 34.29,30.23 v1(31.5,30.23)
  BOTTOM w0.508: P3.2 34.04,39.12 31.5,36.58 v1(31.5,30.23)
GND: length 69.9
  TOP w0.203: v1(4.59,47.11) 4.58,47.1 4.58,46.82 4.78,46.61 U4.3 ; v1(4.59,47.11) U4.2 ; v1(4.59,47.11) 4.58,47.12 4.58,47.41 4.78,47.61 U4.1 ; U6.10 v1(9.55,23.62) ; U4.4 6.23,46.11 v1(6.6,46.48) ; U6.2 v1(9.55,28.82)
  TOP w0.305: P5.6 40.64,3.72 ; P5.6 39.46,2.54 ; P5.6 41.82,2.54 ; A1.4 9.27,36.36 ; A1.4 9.27,35.24 ; A1.4 7.92,35.8 ; U7.2 7.01,17.7 ; U7.2 8.13,17.13 ; U7.2 5.89,17.13 ; U7.2 7.01,16.56 ; 25.23,50.8 P8.7 ; P8.7 26.42,49.62 ; P8.7 27.6,50.8 ; 5.89,14.59 U7.4 ; U7.4 8.13,14.59 ; U7.4 7.01,15.16 ; C26.2 5.04,40.74 ; C26.2 4.32,39.99 ; C26.2 5.04,39.24 ; 8.26,23.2 U6.10 7.11,23.62 ; U7.3 7.01,16.43 ; U7.3 5.89,15.86 ; U7.3 7.01,15.29 ; U7.3 8.13,15.86 ; U7.8 7.01,10.08 ; U7.8 5.89,9.51 ; U7.8 8.13,9.51 ; U7.8 7.01,8.94 ; P5.7 43.18,3.72 ; P5.7 44.36,2.54 ; P5.7 42,2.54
  TOP w0.508: C21.2 v1(6.13,49.02) ; C20.2 v1(6.13,50.55)
  L2_GND w0.305: P5.6 41.82,2.54 ; P5.6 39.46,2.54 ; P5.6 40.64,3.72 ; P5.7 43.18,3.72 ; P5.7 42,2.54 ; P5.7 44.36,2.54 ; P8.7 27.6,50.8 ; P8.7 26.42,49.62 ; P8.7 25.23,50.8
  L3_PWR w0.305: P5.7 44.36,2.54 ; P5.7 43.18,3.72 ; P5.7 42,2.54 ; 41.82,2.54 P5.6 40.64,3.72 ; 26.42,49.62 P8.7 ; P8.7 27.6,50.8 ; P8.7 25.23,50.8
  BOTTOM w0.305: P8.7 27.6,50.8 ; P8.7 25.23,50.8 ; P8.7 26.42,49.62 ; 42,2.54 P5.7 ; P5.7 43.18,3.72 ; P5.7 44.36,2.54 ; P5.6 40.64,3.72 ; P5.6 39.46,2.54 ; P5.6 41.82,2.54
  vias: v1(2.54,49.53) v1(2.54,46.99) v1(2.54,44.45) v1(2.54,21.59) v1(2.54,19.05) v1(2.54,16.51) v1(2.54,8.89) v1(2.54,6.35) v1(3.43,10.84) v1(4.95,10.84) v1(5.08,50.8) v1(5.04,41.02) v1(5.08,8.89) v1(5.08,3.81) v1(5.74,17.13) v1(5.74,15.86) v1(5.74,14.59) v1(5.74,9.51) v1(6.6,47.24) v1(6.66,32.45) v1(7.62,47.24) v1(7.62,46.48) v1(7.72,35.8) v1(10.16,34.29) v1(10.16,29.21) v1(10.16,26.67) v1(10.16,24.13) v1(10.16,21.59) v1(10.16,19.05) v1(10.16,16.51) v1(10.16,13.97) v1(10.16,11.43) v1(10.16,8.89) v1(10.16,3.81) v1(17.78,2.54) v1(20.32,2.54) v1(22.86,43.81) v1(22.86,2.54) v1(25.4,43.81) v1(25.4,2.54) v1(27.94,43.81) v1(30.48,43.81) v1(33.02,43.81) v1(35.56,43.81) v1(38.1,43.81) v1(47.62,43.81) v1(48.26,2.54) v1(50.16,43.81) v1(52.7,43.81) v1(54.61,45.72) v1(57.15,48.26) v1(60.96,48.26) v1(63.5,48.26) v1(66.04,50.8) v1(66.04,48.26) v1(67.31,49.53) v1(68.58,50.8) v1(68.58,48.26) v1(68.58,2.54) v1(69.85,49.53) v1(71.12,50.8) v1(71.12,48.26) v1(71.12,2.54) v1(72.39,49.53) v1(73.66,50.8) v1(73.66,48.26) v1(73.66,2.54) v1(74.93,49.53) v1(75.56,50.8) v1(75.56,48.26)
GND_ISO: length 184.8
  TOP w0.203: DS2.C v1(22.73,16.98) ; U3.C4 v2(39.79,27.07) ; U6.19 v1(14.07,28.82) ; U3.E6 v2(38.59,25.87) ; Y1.2 32.02,25.28 30.12,23.38 Y1.4 ; U3.D5 v2(39.39,26.27) ; U3.E3 v2(38.59,27.47) ; U3.E5 v2(38.59,26.27) ; U6.11 v1(14.07,23.62) ; U3.E4 v2(38.59,27.07)
  TOP w0.254: U1.28 55.02,18.17 v1(54.81,18.38) ; U1.32 55.29,16.17 55.11,15.99 v1(55.11,15.5) ; U2.32 55.29,33.95 55.11,33.77 v1(55.11,33.28)
  TOP w0.305: C18.2 38.18,34.83 ; C18.2 37.43,34.11 ; C18.2 38.93,34.11 ; 52.16,16.44 JP2.1 ; JP2.1 52.16,17.91 ; JP2.1 51.4,17.17 ; C14.2 39.96,35.03 ; C14.2 38.98,34.21 ; C14.2 40.93,34.21 ; 29.6,31.33 CLPF.2 ; CLPF.2 31.1,31.33 ; CLPF.2 30.35,30.61 ; 52.16,18.2 JP1.1 ; JP1.1 52.16,19.68 ; JP1.1 51.4,18.94 ; 14.35,35.24 14.35,35.8 ; 14.35,35.8 15.7,35.8 ; 14.35,35.8 14.35,36.36 ; 38.14,19.29 C16.2 ; C16.2 39.12,18.47 ; C16.2 39.12,20.12 ; 70.14,7.71 P1.2 ; P1.2 71.32,8.89 ; P1.2 68.95,8.89 ; C12.2 43.18,20.12 ; C12.2 43.93,19.39 ; C12.2 43.18,18.67 ; 30.42,20.49 C11.2 ; C11.2 29.69,21.24 ; C11.2 30.42,21.99 ; C11.2 31.14,21.24 ; 27.52,23.79 C15.2 ; C15.2 28.27,23.07 ; C15.2 29.02,23.79 ; JP4.1 52.16,35.69 ; JP4.1 52.16,34.22 ; JP4.1 51.4,34.95 ; 52.16,35.98 JP3.1 ; JP3.1 52.16,37.46 ; JP3.1 51.4,36.72 ; C19.2 36.65,34.83 ; C19.2 37.4,34.11 ; C19.2 35.9,34.11 ; P1.15 72.68,27.85 ; P1.15 71.49,26.67 ; P1.15 72.68,25.49 ; P1.15 73.86,26.67 ; C34.2 18.58,40.74 ; C34.2 19.3,39.99 ; C34.2 18.58,39.24 ; P1.30 71.32,44.45 ; P1.30 70.14,43.27 ; P1.30 70.14,45.63 ; P1.30 68.95,44.45 ; 30.61,7.24 C23.2 29.88,7.99 ; C9.2 42.61,34.11 ; C9.2 41.11,34.11 ; C9.2 41.86,34.83 ; 23.78,15.98 DS2.C 23.78,17.98 ; 68.95,26.67 P1.16 ; P1.16 71.32,26.67 ; P1.16 70.14,25.49 ; 16.51,23.62 U6.11 15.37,23.2 ; P1.29 72.68,45.63 ; P1.29 73.86,44.45 ; P1.29 71.49,44.45 ; P1.29 72.68,43.27 ; 72.68,7.71 P1.1 ; P1.1 71.49,8.89 ; P1.1 72.68,10.07 ; P1.1 73.86,8.89 ; 44.7,39.12 P3.16 43.81,40.01 ; 33,27.85 C10.2 ; C10.2 33.82,28.83 ; C10.2 32.17,28.83 ; 34.16,7.24 C25.2 34.89,7.99 ; 30.12,22.24 Y1.4 29.26,23.19
  TOP w0.508: C63.2 v1(51.18,7.37) ; v1(29.15,22.22) 29.15,22.22 ; C24.2 v1(33.45,13.91) ; R37.2 v1(51.21,8.89) ; C22.2 v1(31.32,13.91) ; v1(40.77,12.69) U8.4 v1(39.67,11.87) ; C27.2 v1(27.72,14.68) ; C31.2 v1(32.19,38.87) ; C13.2 v1(41.4,18.52) ; U5.4 v1(29.72,8.37) ; C17.2 v1(37.08,18.32)
  L2_GND w0.305: 71.49,8.89 P1.1 ; P1.1 73.86,8.89 ; P1.1 72.68,7.71 ; P1.1 72.68,10.07 ; 70.14,25.49 P1.16 ; P1.16 71.32,26.67 ; P1.16 70.14,27.85 ; P1.16 68.95,26.67 ; 43.81,40.01 P3.16 44.7,39.12 ; P1.15 73.86,26.67 ; P1.15 71.49,26.67 ; P1.15 72.68,25.49 ; P1.15 72.68,27.85 ; P1.2 70.14,10.07 ; P1.2 70.14,7.71 ; P1.2 71.32,8.89 ; P1.2 68.95,8.89 ; 71.49,44.45 P1.29 ; P1.29 72.68,43.27 ; P1.29 73.86,44.45 ; P1.29 72.68,45.63 ; P1.30 71.32,44.45 ; P1.30 70.14,45.63 ; P1.30 68.95,44.45 ; P1.30 70.14,43.27
  L3_PWR w0.305: 71.49,8.89 P1.1 ; P1.1 72.68,10.07 ; P1.1 72.68,7.71 ; P1.1 73.86,8.89 ; P1.2 71.32,8.89 ; P1.2 68.95,8.89 ; P1.2 70.14,7.71 ; P1.2 70.14,10.07 ; P1.29 72.68,45.63 ; P1.29 73.86,44.45 ; P1.29 72.68,43.27 ; P1.29 71.49,44.45 ; P1.16 70.14,27.85 ; P1.16 71.32,26.67 ; P1.16 68.95,26.67 ; P1.16 70.14,25.49 ; P1.30 70.14,45.63 ; P1.30 70.14,43.27 ; P1.30 68.95,44.45 ; P1.30 71.32,44.45 ; P1.15 72.68,27.85 ; P1.15 72.68,25.49 ; P1.15 71.49,26.67 ; P1.15 73.86,26.67
  BOTTOM w0.305: 43.81,40.01 P3.16 44.7,39.12 ; 70.14,25.49 P1.16 ; P1.16 68.95,26.67 ; P1.16 71.32,26.67 ; P1.16 70.14,27.85 ; 70.14,43.27 P1.30 ; P1.30 71.32,44.45 ; P1.30 68.95,44.45 ; P1.30 70.14,45.63 ; P1.15 72.68,27.85 ; P1.15 71.49,26.67 ; P1.15 73.86,26.67 ; P1.15 72.68,25.49 ; 68.95,8.89 P1.2 ; P1.2 70.14,10.07 ; P1.2 71.32,8.89 ; P1.2 70.14,7.71 ; 71.49,8.89 P1.1 ; P1.1 73.86,8.89 ; P1.1 72.68,7.71 ; P1.1 72.68,10.07 ; 72.68,43.27 P1.29 ; P1.29 71.49,44.45 ; P1.29 72.68,45.63 ; P1.29 73.86,44.45
  vias: v1(13.34,34.29) v1(13.34,29.21) v1(13.34,26.67) v1(13.34,24.13) v1(13.34,21.59) v1(13.34,19.05) v1(13.34,16.51) v1(13.34,13.97) v1(13.34,11.43) v1(13.97,8.89) v1(15.24,34.29) v1(15.24,21.59) v1(15.9,35.8) v1(17.78,29.21) v1(17.78,24.13) v1(17.78,21.59) v1(17.84,31.5) v1(18.58,40.89) v1(19.69,6.99) v1(20.32,24.13) v1(20.32,21.59) v1(20.32,19.05) v1(20.32,16.51) v1(22.35,10.67) v1(22.86,39.37) v1(22.86,29.21) v1(22.86,21.59) v1(22.86,19.05) v1(22.86,8.89) v1(23.11,12.07) v1(23.11,11.43) v1(23.11,10.67) v1(24.13,6.99) v1(25.4,39.37) v1(25.4,8.89) v1(27.3,24.77) v1(27.32,23.79) v1(27.3,22.73) v1(30.35,30.45) v1(30.42,20.19) v1(30.61,27.18) v1(30.76,7.24) v1(31.62,12.32) v1(31.62,11.05) v1(31.62,9.78) v1(31.97,28.83) v1(32.38,11.68) v1(32.38,10.41) v1(33.15,12.32) v1(33.15,11.05) v1(33.15,9.78) v1(34.01,7.24) v1(36.65,34.99) v1(38.18,34.99) v1(39.12,18.32) v1(39.96,35.19) v1(40.26,8) v1(40.26,7.24) v1(41.86,34.99) v1(43.18,18.52) v1(48.26,13.97) v1(50.8,13.97) v1(50.8,6.35) v1(51.2,36.72) v1(51.18,34.95) v1(51.2,18.94) v1(51.18,17.17) v1(54.61,30.48) v1(54.61,22.86) v1(55.88,44.45) v1(57.15,30.48) v1(57.15,22.86) v1(58.42,44.45) v1(58.42,41.91) v1(58.42,8.89) v1(58.42,6.35) v1(60.83,15.24) v1(60.96,44.45) v1(60.96,41.91) v1(60.96,38.1) v1(60.96,20.32) v1(60.96,8.89) v1(60.96,6.35) v1(63.5,44.45) v1(63.5,41.91) v1(63.5,8.89) v1(63.5,6.35) v1(64.14,38.1) v1(64.77,33.02) v1(65.41,15.24) v1(66.04,44.45) v1(66.04,41.91) v1(67.31,17.14) v1(67.31,15.24) v1(68.58,44.45) v1(68.58,41.91) v1(68.58,33.66) v1(68.58,27.3) v1(68.58,25.4) v1(68.58,6.35) v1(71.12,6.35) v1(73.66,6.35)
+VS: length 1.8
  TOP w0.254: U2.24 v1(56.56,39.06) ; U1.24 v1(56.56,21.28)
  vias: v1(54.61,7.7) v1(54.61,6.99)
-VS: length 4
  TOP w0.254: U2.1 v1(56.56,32.35) ; U1.1 v1(56.56,14.57)
  TOP w0.508: C64.2 43.6,7.33 C61.N
  vias: v1(42.93,6.48) v1(43.69,6.48) v1(57.15,36.83) v1(57.15,35.69) v1(57.15,34.54) v1(57.15,19.05) v1(57.15,17.91) v1(57.15,16.76) v1(58.29,36.83) v1(58.31,35.7) v1(58.29,34.54) v1(58.29,19.05) v1(58.31,17.92) v1(58.29,16.76) v1(59.44,36.83) v1(59.44,35.69) v1(59.44,34.54) v1(59.44,19.05) v1(59.44,17.91) v1(59.44,16.76)
AIN0: length 10.8
  TOP w0.203: U3.D2 v2(39.39,27.87) ; C5.2 v1(45.19,27.46)
  L2_GND w0.203: v1(44.58,30.48) 42,30.48 v2(39.39,27.87)
  BOTTOM w0.203: v1(45.19,27.46) 44.58,28.08 v1(44.58,30.48)
AIN1: length 25.4
  TOP w0.203: U3.B3 v2(40.19,27.47) ; C6.2 v1(45.19,29.59) ; JP5.2 v1(48.77,15.49)
  L2_GND w0.203: v2(40.19,27.47) 40.42,27.47 42.54,29.59 v1(45.19,29.59)
  BOTTOM w0.203: v1(48.77,15.49) 44.2,20.07 44.2,22.86 45.97,24.64 45.97,28.81 v1(45.19,29.59)
AIN2: length 8
  TOP w0.203: U3.A3 40.58,27.27 41.66,28.35 41.66,28.96 44.42,31.72 C7.2
AIN3: length 12.9
  TOP w0.203: U3.B5 v2(40.19,26.27) ; v1(45.19,33.84) C8.2
  L2_GND w0.203: v1(43.05,26.42) 42.42,25.78 41.15,25.78 40.66,26.27 v2(40.19,26.27)
  BOTTOM w0.203: v1(45.19,33.84) 44.02,32.67 44.02,27.38 v1(43.05,26.42)
AIN4: length 17.8
  TOP w0.203: CLPF.1 v1(30.35,33.81) ; U3.B4 v2(40.19,27.07)
  L2_GND w0.203: v1(41.91,26.42) 41.26,27.07 v2(40.19,27.07)
  L3_PWR w0.203: v1(41.91,26.42) 38.61,29.72 36.32,29.72 32.23,33.81 v1(30.35,33.81)
CE0: length 13.6
  TOP w0.203: v1(45.09,22.22) 42.95,24.36 42,24.36 40.68,25.67 U3.A7 ; R27.2 v1(48.77,17.14)
  BOTTOM w0.203: v1(48.77,17.14) 45.09,20.83 v1(45.09,22.22)
CS: length 32.3
  TOP w0.203: U6.15 21.08,26.22 29.59,17.7 34.09,17.7 35.18,18.8 35.18,21.84 v1(36.2,22.86) ; U3.F7 v2(38.19,25.47)
  L2_GND w0.203: v1(36.2,22.86) 36.2,24 36.96,24.77 37.49,24.77 v2(38.19,25.47)
CS_ARD: length 69.2
  TOP w0.203: P7.1 46.79,44.45 46.99,44.65 v1(46.99,45.72) ; P7.5 46.79,46.99 46.99,46.79 v1(46.99,45.72) ; v1(46.99,45.72) P7.3 ; U6.6 v1(6.35,26.22)
  BOTTOM w0.203: v1(6.35,26.22) 5.79,26.22 5.38,26.62 5.38,39.23 6.01,39.85 6.01,41.19 6.6,41.78 7.12,41.78 11.64,46.3 46.41,46.3 v1(46.99,45.72)
DE0: length 6.5
  TOP w0.203: C4.2 v1(45.19,25.34) ; U3.B6 v2(40.19,25.87)
  L2_GND w0.203: v1(45.19,25.34) 40.96,25.34 40.42,25.87 v2(40.19,25.87)
GP0: length 49.6
  TOP w0.203: P3.1 v1(25.53,37.85) ; U3.F5 v2(38.19,26.27) ; U6.12 v1(16.71,24.27)
  L2_GND w0.203: v1(31.88,27.54) 33.8,27.54 35.07,26.27 v2(38.19,26.27)
  BOTTOM w0.203: P3.1 34.92,30.58 v1(31.88,27.54) ; v1(16.71,24.27) 16,24.98 16,32.26 21.59,37.85 v1(25.53,37.85)
GP1: length 83
  TOP w0.203: U3.D6 v2(39.39,25.87) ; P3.3 37.48,36.56 42.82,36.56 44.08,35.31 49.15,35.31 50.16,34.29 50.16,32.77 51.18,31.75 53.11,31.75 v1(53.7,32.34) R20.2 53.7,33.38 54.77,34.45 U2.31 ; v1(37.47,22.86) 36.99,22.86 35.69,21.56 35.69,18.67 34.16,17.14 v1(31.88,17.14) ; U1.31 54.77,16.67 53.7,15.6 R19.2 v1(53.7,14.56)
  L2_GND w0.203: v2(39.39,25.87) 38.99,25.47 38.99,24.74 37.47,23.21 v1(37.47,22.86)
  BOTTOM w0.203: v1(31.88,17.14) 31.24,17.78 31.24,19.81 33.32,21.89 33.32,28.24 35.81,30.73 35.81,35.05 36.2,35.43 P3.3 ; v1(53.7,32.34) v1(53.7,14.56)
GP2: length 20.4
  TOP w0.203: U3.E1 38.79,28.77 37.08,30.48 v1(36.7,30.48) ; 37.47,37.85 38.35,36.96 45.56,36.96 45.57,36.96 R28.2
  BOTTOM w0.203: 37.47,37.85 37.47,31.24 v1(36.7,30.48)
GP3: length 10.6
  TOP w0.203: U3.E2 v2(38.59,27.87)
  L2_GND w0.203: v2(38.59,27.87) v1(38.59,30.48)
  BOTTOM w0.203: P3.7 38.73,36.2 39.12,35.81 39.12,31 v1(38.59,30.48)
GP4: length 35.4
  TOP w0.203: v1(31.88,19.56) 33.32,19.56 33.53,19.76 33.53,22.99 35.69,25.15 37.21,25.15 37.74,25.67 U3.G7
  BOTTOM w0.203: v1(31.88,19.56) 33.73,21.41 33.73,28.02 35.64,29.92 39.95,29.92 40.77,30.73 40.77,35.69 40.01,36.45 40.01,37.85
GP5: length 24.7
  TOP w0.203: U3.F6 v2(38.19,25.87)
  L2_GND w0.203: v1(34.29,24.77) 34.8,25.27 37.34,25.27 37.93,25.87 v2(38.19,25.87)
  BOTTOM w0.203: v1(34.29,24.77) 34.29,27.94 35.81,29.46 41.14,29.46 42.48,30.8 42.48,35.37 41.27,36.58 P3.11
GP6: length 20.8
  TOP w0.203: U3.F4 v2(38.19,27.07)
  L2_GND w0.203: v2(38.19,27.07) 37.95,26.82 35.53,26.82 v1(34.92,27.43)
  BOTTOM w0.203: v1(34.92,27.43) 34.92,27.87 36.11,29.06 41.31,29.06 42.9,30.65 42.9,35.97 42.55,36.32 P3.13
GP7: length 19.1
  TOP w0.203: v1(35.81,27.43) 36.38,26.87 U3.G4
  BOTTOM w0.203: P3.15 43.81,36.45 43.31,35.94 43.31,30.48 41.48,28.65 36.4,28.65 35.81,28.07 v1(35.81,27.43)
INT: length 76.4
  TOP w0.203: U6.9 v1(6.67,24.27)
  BOTTOM w0.203: v1(6.67,24.27) 6.67,24.62 4.95,26.34 4.95,39.37 5.6,40.02 5.6,41.41 6.45,42.27 7.03,42.27 11.47,46.71 54.33,46.71 P9.3
IOVDD: length 68.4
  TOP w0.508: v1(6.64,41.02) C26.1 7.38,39.99 7.76,39.61 A1.1 ; R30.1 v1(2.41,36.69) ; R31.1 v1(2.41,38.34)
  BOTTOM w0.762: P5.2 30.48,3.56 29.72,4.32 26.04,4.32 25.35,3.63 17.96,3.63 15.88,5.71 8.89,5.71 6.86,7.75 6.86,18.92 2.41,23.37 v1(2.41,36.69) v1(2.41,38.34)
MISO: length 32.4
  TOP w0.203: U6.16 21,26.87 29.76,18.11 33.8,18.11 34.75,19.05 34.75,22.3 35.89,23.44 37.8,23.44 38.79,24.44 U3.E8
MISO_ARD: length 44.5
  TOP w0.203: JP10.1 v1(31.5,45.72) ; U6.5 v1(6.96,26.87)
  BOTTOM w0.203: v1(6.96,26.87) 6.1,26.87 5.79,27.17 5.79,38.94 7.2,40.35 7.2,41.29 11.63,45.72 v1(31.5,45.72)
MOSI: length 32.3
  TOP w0.203: U6.17 20.93,27.52 29.93,18.52 33.64,18.52 34.34,19.22 34.34,22.53 35.81,24 v1(37.47,24) ; U3.E7 v2(38.59,25.47)
  L2_GND w0.203: v1(37.47,24) 38.59,25.13 v2(38.59,25.47)
MOSI_ARD: length 47.1
  TOP w0.203: JP11.1 v1(34.04,44.96) ; U6.4 v1(6.35,27.52)
  BOTTOM w0.203: v1(6.35,27.52) 6.35,28.32 6.4,28.37 6.4,28.4 7.24,29.24 7.24,32.7 6.2,33.74 6.2,38.77 7.61,40.18 7.61,41.12 11.8,45.31 29.49,45.31 29.84,44.96 v1(34.04,44.96)
RC0_0: length 42.9
  TOP w0.203: CTIA.1 28.19,33.81 27.2,34.8 RTIA_X.1 ; U3.C8 39.59,24.54 40.01,24.13 40.01,21.97 40.39,21.59 40.39,17.65 39.27,16.54 29.69,16.54 v1(25.15,21.08)
  BOTTOM w0.203: v1(25.15,21.08) 25.15,33.67 RTIA_X.1
RC0_1: length 40.3
  TOP w0.203: U3.B8 39.99,24.9 41.4,23.49 41.4,22.61 42.29,21.72 42.29,17.6 40.82,16.13 29.07,16.13 v1(26.28,18.92) ; CTIA.2 28.19,30.45 27.46,29.72 RTIA_X.2
  BOTTOM w0.203: v1(26.28,18.92) RTIA_X.2
RCAL0: length 36.3
  TOP w0.203: RCAL.1 22.86,33.78 21.84,34.8 RCAL_X.1 20.96,35.81 21.95,36.8 32.79,36.8 33.85,35.75 42.49,35.75 43.31,34.92 43.31,32 41.15,29.84 40.77,29.84 39.59,28.67 U3.C1
RCAL1: length 44.2
  TOP w0.203: RCAL.2 22.86,30.48 22.1,29.72 RCAL_X.2 20.07,29.72 19.56,30.23 19.56,35.18 21.59,37.21 32.96,37.21 34.02,36.15 42.65,36.15 43.71,35.09 43.71,31.84 41.32,29.44 41,29.44 39.99,28.44 U3.B1
RE0: length 7.9
  TOP w0.203: C2.2 45.08,21.08 44.2,21.97 44.2,22.48 42.72,23.95 41.71,23.95 U3.A8
RESET: length 36.9
  TOP w0.203: U3.F1 38.39,28.28 37.08,29.59 36.4,29.59 R36.1 34.75,33.96 32.51,36.2 v1(25.53,36.2) ; v1(16.71,25.15) 16.48,24.92 U6.13
  BOTTOM w0.203: v1(16.71,25.15) 16.71,32.2 20.7,36.2 v1(25.53,36.2)
RST: length 74.9
  TOP w0.203: U6.8 v1(5.59,24.92)
  BOTTOM w0.203: v1(5.59,24.92) 4.48,26.02 4.48,41.38 5.78,42.67 6.86,42.67 11.3,47.12 52.2,47.12 P9.4
SCL: length 72.6
  TOP w0.203: U2.27 55.31,36.45 53.66,38.1 53.09,38.1 v1(52.83,37.85) 52.58,38.1 51.88,38.1 48.57,41.4 22.35,41.4 21.21,40.26 21.21,37.59 19.48,35.87 17.65,35.87 16.93,36.59 R34.2 16.23,36.69 15.85,37.07 14.35,37.07 ; v1(52.83,20.07) 53.09,20.32 53.66,20.32 55.31,18.67 U1.27
  BOTTOM w0.203: v1(52.83,20.07) 52.58,20.32 51.94,20.32 51.44,20.83 51.44,32 53.59,34.16 53.59,37.78 53.27,38.1 53.09,38.1 v1(52.83,37.85)
SCL_ARD: length 32.9
  TOP w0.203: U4.6 9.52,46.61 12.07,44.07 v1(18.8,44.07) JP7.1 ; A1.3 v1(7.77,37.07) 7.39,36.69 R30.2
  BOTTOM w0.203: v1(18.8,44.07) 11.7,44.07 8.42,40.79 8.42,39.78 7.21,38.57 7.21,37.63 v1(7.77,37.07)
SCLK: length 31.6
  TOP w0.203: U3.F8 38.39,24.99 38.04,24.64 35.81,24.64 33.93,22.76 33.93,19.39 33.47,18.92 30.1,18.92 20.85,28.17 U6.18
SCLK_ARD: length 40.1
  TOP w0.203: U6.3 v1(6.96,28.17) ; JP9.1 v1(28.96,44.7)
  BOTTOM w0.203: v1(6.96,28.17) 7.75,28.95 7.75,32.77 6.6,33.91 6.6,38.54 8.01,39.95 8.01,40.95 11.76,44.7 v1(28.96,44.7)
SDA: length 71.3
  TOP w0.203: 14.35,38.34 R33.2 16.93,38.24 17.63,37.54 19.51,37.54 20.8,38.84 20.8,40.43 22.18,41.81 48.74,41.81 52.04,38.51 52.48,38.51 v1(52.83,38.86) 53.19,38.51 53.83,38.51 55.38,36.95 U2.26 ; v1(52.83,21.08) 53.19,20.73 53.83,20.73 55.38,19.17 U1.26
  BOTTOM w0.203: v1(52.83,21.08) 52.55,20.8 52.04,20.8 51.84,21 51.84,31.84 54,33.99 54,37.95 53.44,38.51 53.19,38.51 v1(52.83,38.86)
SDA_ARD: length 36
  TOP w0.203: U4.5 9.43,46.11 12.11,43.43 20.7,43.43 v1(21.34,44.07) JP8.1 ; R31.2 v1(7.77,38.34) A1.2
  BOTTOM w0.203: v1(21.34,44.07) 20.7,43.43 11.64,43.43 8.83,40.62 8.83,39.67 8.83,39.4 v1(7.77,38.34)
SE0: length 7
  TOP w0.203: U3.A6 40.86,26.07 42.16,24.77 43.31,24.77 44.86,23.21 C3.2
UNNAMED_2_AD5940_I2_AVDDREG: length 5.1
  TOP w0.203: 38.86,23.62 39.19,23.95 U3.D8
  TOP w0.508: 38.86,23.62 38.23,22.99 38.23,22.24 C17.1
UNNAMED_2_AD5940_I2_VBIASCAP: length 4.7
  TOP w0.203: U3.D1 39.24,28.12 39.24,30.86
  TOP w0.508: C14.1 39.96,31.57 39.24,30.86
UNNAMED_2_ADG2128_I3_A1: length 2.9
  TOP w0.203: U1.29 54.72,17.67 53.53,18.86 JP1.2
UNNAMED_2_ADG2128_I3_A2: length 2.3
  TOP w0.203: U1.30 JP2.2
UNNAMED_2_ADG2128_I4_A1: length 2.9
  TOP w0.203: U2.29 54.72,35.45 53.53,36.64 JP3.2
UNNAMED_2_ADG2128_I4_A2: length 2.3
  TOP w0.203: U2.30 JP4.2
UNNAMED_2_CAP_I21_N2: length 3.5
  TOP w0.203: JP5.1 R27.1 C1.2
UNNAMED_2_DIOLED_I62_N: length 2
  TOP w0.203: R28.1 DS1.C
UNNAMED_3_ADM7150_I11_BYP: length 4.4
  TOP w0.381: U5.3 28.58,10.41 28.28,10.12 C23.1
UNNAMED_3_ADM7150_I11_REF: length 5.8
  TOP w0.381: U5.5 36.49,9.14 ; 36.49,9.14 36.49,10.03 36.11,10.41 U5.6 ; 36.49,9.14 C25.1
UNNAMED_3_ADM8829_I84_CAP: length 2.3
  TOP w0.508: U8.3 C60.N
UNNAMED_3_ADM8829_I84_CAP_1: length 8.3
  TOP w0.508: U8.6 C62.2 38.86,13.59 39.5,14.22 C60.P
UNNAMED_3_ADUM5020_I1_GNDISO1: length 2.6
  TOP w0.508: U7.15 v1(17.93,17.13) ; U7.13 v1(17.93,14.59)
  vias: v1(18.41,10.54) v1(18.41,9.65) v1(19.18,10.54) v1(19.18,9.65) v1(19.94,10.54) v1(19.94,9.65)
UNNAMED_3_ADUM5020_I1_VISO: length 4.4
  TOP w0.508: C32.1 18.67,15.37 18.18,15.86 U7.14
UNNAMED_3_CAP_I88_N1: length 18.2
  TOP w0.508: D2.A D1.C 48.63,7.23 47.12,5.71 39.37,5.71 38.86,6.22 C62.1
UNNAMED_3_CN10P_I76_N1: length 3.8
  TOP w0.203: P7.6 P8.1
UNNAMED_3_CN10P_I76_N2: length 7
  TOP w0.203: P7.4 40.16,45.72 39.12,46.76 P8.2
UNNAMED_3_CN10P_I76_N3: length 9.9
  TOP w0.203: P8.3 36.58,47.12 39.24,44.45 P7.2
UNNAMED_3_CN10P_I76_N4: length 2.6
  TOP w0.203: P8.4 JP11.2
UNNAMED_3_CN10P_I76_N5: length 2.6
  TOP w0.203: P8.5 JP10.2
UNNAMED_3_CN10P_I76_N6: length 2.6
  TOP w0.203: P8.6 JP9.2
UNNAMED_3_CN10P_I76_N9: length 2.6
  TOP w0.203: P8.9 JP8.2
UNNAMED_3_CN10P_I76_N10: length 2.6
  TOP w0.203: P8.10 JP7.2
UNNAMED_3_CNJMPRSHRT_I57_S2: length 1.6
  TOP w0.254: JP12.2 R35.1
UNNAMED_3_DIOLED_I54_P: length 1.6
  TOP w0.254: R35.2 DS2.A
UNNAMED_3_FERRITE_I22_N2: length 1.5
  TOP w0.508: E1.2 R32.1
VBIAS: length 56.8
  TOP w0.203: U3.C7 v2(39.79,25.47)
  TOP w0.508: v1(40.77,22.86) 40.77,22.35 41.4,21.72 C13.1
  L2_GND w0.203: v2(39.79,25.47) 39.79,24.76 40.77,23.79 v1(40.77,22.86)
  BOTTOM w0.508: v1(40.77,22.86) 38.1,20.19 36.07,20.19 34.92,19.05 34.92,17.02 33.4,15.49 30.86,15.49 28.58,17.78 28.58,20.65 29.86,21.93 29.86,24.88 28.58,26.16 28.58,37.85 31.75,41.02 37.85,41.02 38.73,40.13 P3.8
VREF_1V8: length 26.7
  TOP w0.203: v1(43.05,27.56) 42.47,26.97 41.45,26.97 40.95,26.47 U3.A5
  TOP w0.508: C9.1 v1(41.86,31.63)
  L3_PWR w0.508: P3.4 36.2,39.75 35.69,40.26 33.78,40.26 33.27,39.75 33.27,35.94 36.45,32.77 40.73,32.77 v1(41.86,31.63) 43.05,30.44 v1(43.05,27.56)
VREF_2V5: length 49.3
  TOP w0.203: U3.D7 v2(39.39,25.47)
  TOP w0.508: C16.1 v1(39.12,22.86)
  L2_GND w0.203: v2(39.39,25.47) 39.39,23.14 v1(39.12,22.86)
  BOTTOM w0.508: 37.47,39.12 37.47,39.75 36.96,40.26 32.38,40.26 29.59,37.46 29.59,26.54 30.86,25.27 30.86,21.72 29.46,20.32 29.46,18.16 31.24,16.38 33.02,16.38 33.91,17.27 33.91,19.28 35.71,21.08 37.34,21.08 v1(39.12,22.86)
VZERO: length 63.6
  TOP w0.203: U3.B7 v2(40.19,25.47)
  TOP w0.508: v1(42.42,22.86) 43.18,22.1 C12.1
  L2_GND w0.203: v1(42.42,22.86) 40.19,25.08 v2(40.19,25.47)
  BOTTOM w0.508: 40.01,39.12 40.01,40.13 38.35,41.78 30.99,41.78 27.56,38.35 27.56,25.78 28.32,25.02 28.32,21.84 27.64,21.16 27.64,17.45 30.47,14.62 33.79,14.62 35.94,16.76 35.94,18.8 36.45,19.3 38.86,19.3 v1(42.42,22.86)
WP: length 46.2
  TOP w0.203: v1(12.19,47.75) 11.55,47.11 R29.2 U4.7
  BOTTOM w0.203: v1(12.19,47.75) 50.29,47.75 P9.5
X0: length 18.6
  TOP w0.203: U1.3 57.56,14.23 60.11,11.68 67.94,11.68 69.47,10.16 71.41,10.16 P1.3
X1: length 14.4
  TOP w0.203: U1.4 58.06,14.31 60.17,12.19 69.37,12.19 P1.4
X2: length 16.4
  TOP w0.203: P1.5 71.41,12.7 60.24,12.7 58.56,14.38 U1.5
X3: length 12.9
  TOP w0.203: P1.6 69.37,13.21 60.31,13.21 59.06,14.46 U1.6
X4: length 15.6
  TOP w0.203: U1.7 59.56,14.53 60.37,13.72 68.07,13.72 69.6,15.24 71.41,15.24 P1.7
X5: length 11.9
  TOP w0.203: P1.8 68.72,15.1 68.72,15.1 67.85,14.22 60.64,14.22 60.06,14.81 U1.8
X6: length 15.7
  TOP w0.203: P1.9 71.41,17.78 69.47,17.78 68.83,18.41 68.83,19.43 67.16,21.11 60.26,21.11 60.06,20.9 U1.17
X7: length 12.5
  TOP w0.203: P1.10 69.04,20.15 67.67,21.51 59.99,21.51 59.56,21.08 U1.18
X8: length 16
  TOP w0.203: P1.11 71.41,20.32 69.6,20.32 68,21.92 59.64,21.92 59.06,21.34 U1.19
X9: length 13.3
  TOP w0.203: U1.20 58.56,21.47 59.41,22.33 69.4,22.33 P1.12
X10: length 16.9
  TOP w0.203: U1.21 58.06,21.61 59.18,22.73 71.28,22.73 P1.13
X11: length 14.9
  TOP w0.203: P1.14 69.14,23.14 58.95,23.14 57.56,21.74 U1.22
X12: length 18.6
  TOP w0.203: P1.17 71.41,27.94 69.47,27.94 67.94,29.46 60.11,29.46 57.56,32.01 U2.3
X13: length 14.4
  TOP w0.203: P1.18 69.37,29.97 60.17,29.97 58.06,32.09 U2.4
X14: length 16.4
  TOP w0.203: P1.19 71.41,30.48 60.24,30.48 58.56,32.16 U2.5
X15: length 12.9
  TOP w0.203: P1.20 69.37,30.99 60.31,30.99 59.06,32.24 U2.6
X16: length 15.6
  TOP w0.203: U2.7 59.56,32.31 60.37,31.5 68.07,31.5 69.6,33.02 71.41,33.02 P1.21
X17: length 11.9
  TOP w0.203: P1.22 67.85,32 60.64,32 60.06,32.59 U2.8
X18: length 15.9
  TOP w0.203: U2.17 60.06,38.81 60.26,39.01 67.03,39.01 68.83,37.21 68.83,36.2 69.47,35.56 71.41,35.56 P1.23
X19: length 12.8
  TOP w0.203: P1.24 67.54,39.42 59.76,39.42 59.56,39.22 U2.18
X20: length 16.3
  TOP w0.203: P1.25 71.41,38.1 69.6,38.1 67.87,39.83 59.51,39.83 59.06,39.37 U2.19
X21: length 13.6
  TOP w0.203: U2.20 58.56,39.5 59.29,40.23 69.27,40.23 P1.26
X22: length 17
  TOP w0.203: P1.27 71.41,40.64 59.12,40.64 58.06,39.58 U2.21
X23: length 15
  TOP w0.203: U2.22 57.56,39.65 58.95,41.05 69.27,41.05 P1.28
XTALI: length 10.6
  TOP w0.203: C15.1 Y1.3 30.12,25.54 31.04,26.47 32.97,26.47 33.35,26.09 36.75,26.09 37.14,26.47 U3.G5
XTALO: length 9.8
  TOP w0.203: U3.G6 37.25,26.07 36.86,25.68 33.3,25.68 33.02,25.4 33.02,24.26 32.02,23.25 Y1.1 C11.1
Y0: length 49.5
  TOP w0.203: U1.9 61.31,16.17 61.75,15.73 v1(63.22,15.73) ; C1.1 48.93,18.96 49.63,19.66 49.63,20.98 52.78,24.13 v1(67.54,24.13) ; U2.9 61.31,33.95 61.75,33.51 v1(63.22,33.51)
  BOTTOM w0.203: v1(63.22,15.73) 63.24,15.75 63.88,15.75 67.54,19.41 v1(67.54,24.13) 67.54,29.19 v1(63.22,33.51)
Y1: length 46.6
  TOP w0.203: v1(62.72,16.29) 61.83,16.29 61.44,16.67 U1.10 ; U2.10 61.44,34.45 61.83,34.07 v1(62.72,34.07) ; v1(66.91,24.77) 52.58,24.77 48.9,21.08 C2.1
  BOTTOM w0.203: v1(62.72,34.07) 62.72,33.76 62.61,33.66 62.61,33.29 66.91,29 v1(66.91,24.77) 66.91,19.48 63.72,16.29 v1(62.72,16.29)
Y2: length 46.2
  TOP w0.203: C3.1 49.75,23.21 51.94,25.4 v1(66.27,25.4) ; v1(63.22,16.85) 61.9,16.85 61.58,17.17 U1.11 ; U2.11 61.58,34.95 61.9,34.63 v1(63.22,34.63)
  BOTTOM w0.203: v1(63.22,34.63) 62.48,34.63 62.16,34.3 62.16,33.17 66.27,29.06 v1(66.27,25.4) 66.27,19.53 63.58,16.85 v1(63.22,16.85)
Y3: length 43.7
  TOP w0.203: C4.1 50.99,25.34 51.69,26.04 v1(65.64,26.04) ; U1.12 61.71,17.67 61.95,17.43 v1(62.72,17.43) ; v1(62.72,35.21) 61.95,35.21 61.71,35.45 U2.12
  BOTTOM w0.203: v1(62.72,17.43) 63.53,17.43 65.64,19.53 v1(65.64,26.04) 65.64,29.12 61.75,33.01 61.75,34.57 62.39,35.21 v1(62.72,35.21)
Y4: length 42.9
  TOP w0.203: v1(62.72,36.2) 61.95,36.2 61.71,35.95 U2.13 ; v1(62.72,18.41) 61.95,18.41 61.71,18.17 U1.13 ; v1(65,26.67) 51.56,26.67 50.77,27.46 C5.1
  BOTTOM w0.203: v1(62.72,36.2) 61.34,34.82 61.34,32.84 65,29.18 v1(65,26.67) 65,19.54 63.88,18.41 v1(62.72,18.41)
Y5: length 44
  TOP w0.203: v1(63.22,19) 61.9,19 61.58,18.67 U1.14 ; C6.1 49.66,29.59 51.94,27.3 v1(64.44,27.3) ; U2.14 61.58,36.45 61.9,36.78 v1(63.22,36.78)
  BOTTOM w0.203: v1(63.22,36.78) 62.43,36.78 60.94,35.28 60.94,32.67 64.44,29.16 v1(64.44,27.3) 64.44,19.74 63.7,19 v1(63.22,19)
Y6: length 42.9
  TOP w0.203: v1(62.72,19.56) 61.83,19.56 61.44,19.17 U1.15 ; C7.1 49.05,31.72 52.83,27.94 v1(63.86,27.94) ; U2.15 61.44,36.95 61.83,37.34 v1(62.72,37.34)
  BOTTOM w0.203: v1(62.72,19.56) 63.45,19.56 63.86,19.96 v1(63.86,27.94) 63.86,29.17 60.53,32.5 60.53,35.64 62.23,37.34 v1(62.72,37.34)
Y7: length 44.6
  TOP w0.203: C8.1 49.21,33.84 49.43,33.63 49.43,32.11 52.96,28.57 v1(63.22,28.57) ; U2.16 61.31,37.45 61.75,37.9 v1(63.22,37.9) ; U1.16 61.31,19.67 61.75,20.12 v1(63.22,20.12)
  BOTTOM w0.203: v1(63.22,37.9) 62.15,37.9 60.07,35.81 60.07,32.38 63.22,29.23 v1(63.22,28.57) v1(63.22,20.12)

## Copper pours and planes (outline as drawn; the poured copper is in the pictures)
3V_ARD on TOP (solid shape): 9.65,32 9.65,29.34 6.86,29.34 6.86,30.1 7.75,30.99 7.75,32.51 9.14,32.51
3V_ARD on TOP (solid shape): 11.3,50.67 11.3,48.39 11.11,48.39 11.11,49.21 11.05,49.35 10.91,49.41 9.92,49.41 9.77,49.35 9.71,49.21 9.71,48.42 9.74,48.31 9.82,48.24 9.88,48.16 9.85,48.08 9.27,47.5 8.26,47.5 8.26,51.44 10.54,51.44
3V_ARD on BOTTOM: 9.4,51.05 9.4,48.89 10.03,48.89 11.05,49.91 11.05,51.05 10.8,51.31 9.65,51.31
3V_ARD on L3_PWR: 7.87,50.42 7.87,30.86 8,30.73 9.53,30.73 9.65,30.86 9.65,32.13 9.27,32.51 9.27,47.88 11.05,49.66 11.05,51.05 10.8,51.31 8.76,51.31
5V on TOP (solid shape): 23.5,14.35 23.5,12.83 20.57,12.83 20.57,14.35 20.57,14.61 23.24,14.61
5V on TOP (solid shape): 46.1,12.07 46.1,10.29 44.7,10.29 44.32,10.67 42.67,10.67 42.67,11.18 44.32,11.18 44.7,11.56 44.7,12.07 44.83,12.19 45.97,12.19
5V on TOP (solid shape): 37.08,15.49 37.08,11.56 36.83,11.3 34.29,11.3 34.29,12.07 35.81,12.07 35.81,12.57 34.29,12.57 34.29,13.34 34.54,13.59 34.54,15.75 36.83,15.75
5V on L3_PWR: 36.96,9.14 46.23,9.14 46.23,16.38 27.69,16.38 27.69,14.48 29.08,14.48 29.08,10.16 23.37,10.16 23.37,15.11 19.81,15.11 19.81,6.48 19.82,6.48 36.96,6.48
5V_ARD on TOP (solid shape): 5.71,13.72 7.62,13.72 7.62,12.95 2.79,12.95 2.79,15.11 2.92,15.24 4.19,15.24
5V_ARD on L3_PWR: 39.24,1.52 39.24,4.31 38.02,4.31 36.87,5.46 18.97,5.46 17.06,7.37 13.51,7.37 11.43,9.44 11.43,10.16 10.54,11.05 10.54,15.62 1.27,15.62 1.27,1.52
DVDD on TOP (solid shape): 15.88,30.99 16.76,30.1 16.76,29.34 13.97,29.34 13.97,32 14.48,32.51 15.88,32.51
DVDD on TOP (solid shape): 28.96,12.07 30.23,12.07 30.23,11.3 28.83,11.3 28.45,10.92 25.53,10.92 25.27,11.18 25.27,12.7 28.32,12.7
